# EAGLE board SynthV1 (EAGLE 9.3.2)
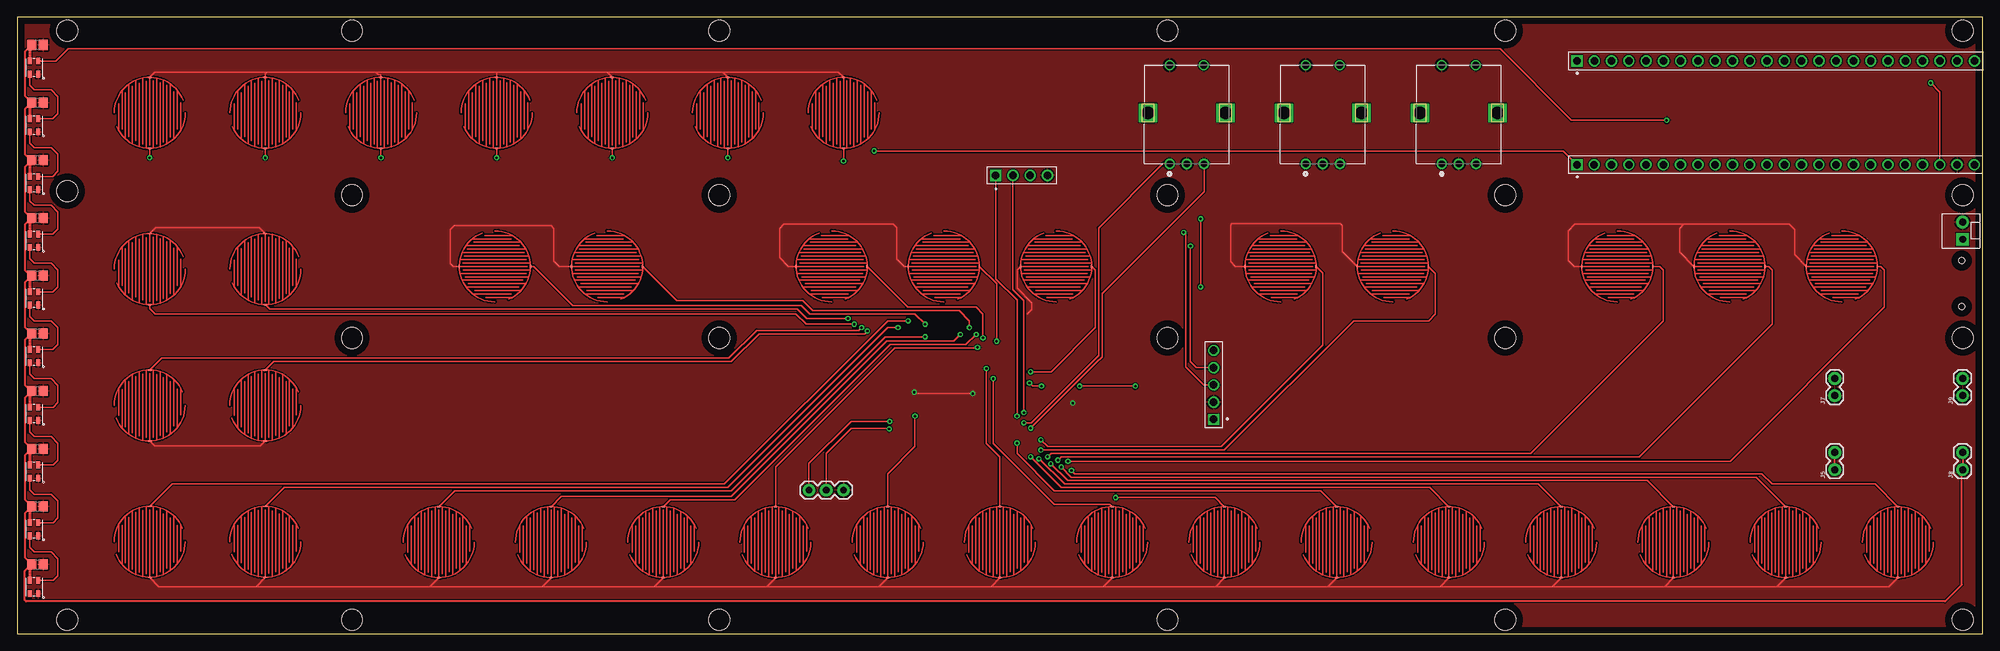
[diagram p0: board, top side]
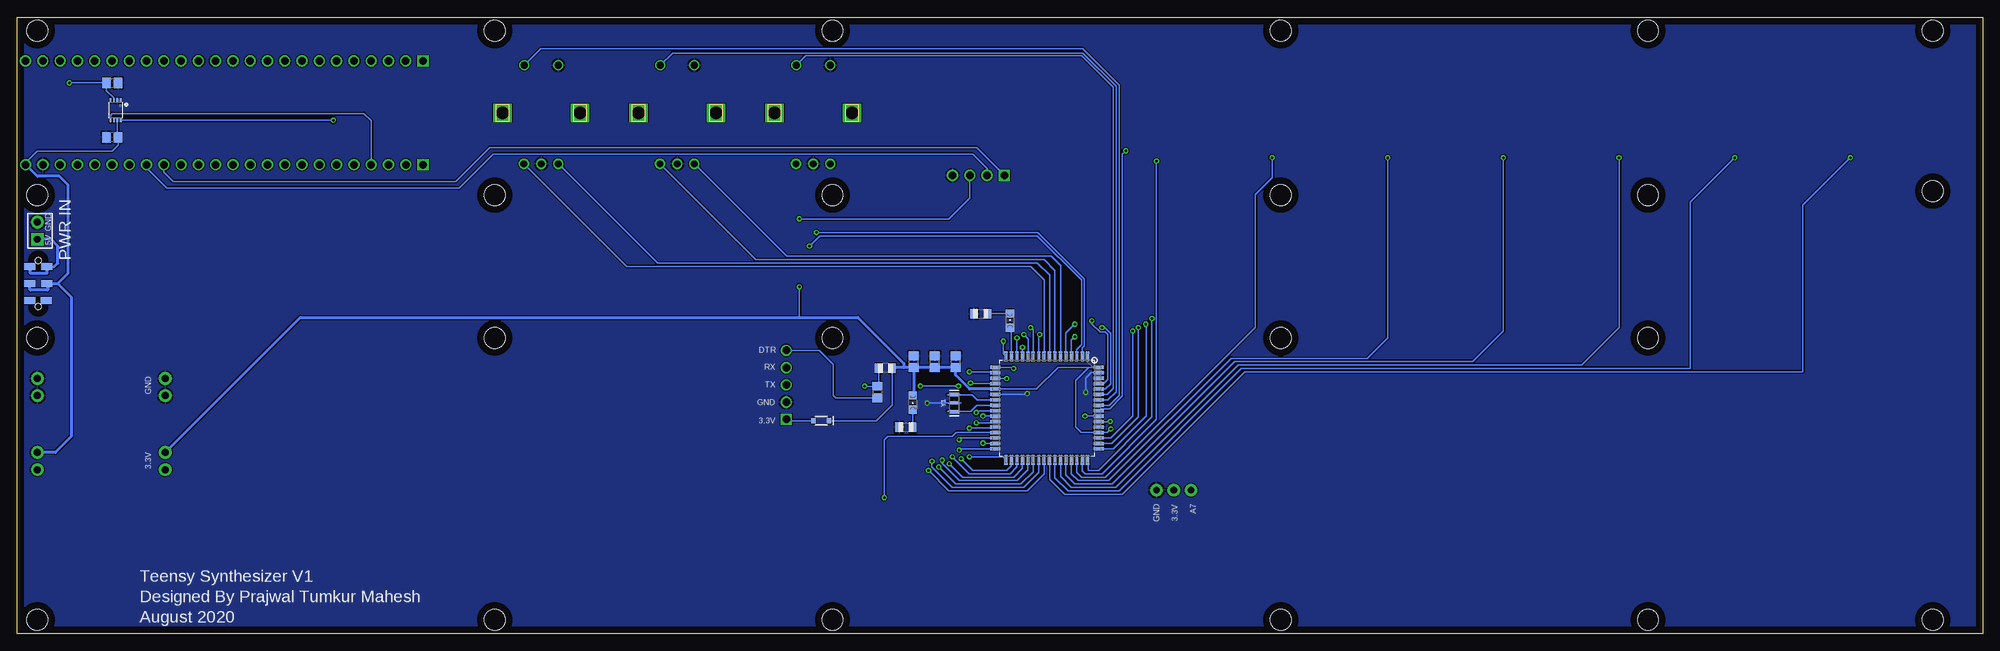
[diagram p1: board, bottom side, seen from below]

Size 289 x 90.7 mm. Coordinates in mm from the lower left corner, seen from the top.
Outline: 0,0 289,0 289,90.7 0,90.7 0,0
Copper layers (1*16): Top 0.035mm / dielectric 1.5mm / Bottom 0.035mm
Design rules "default": minimum track width 6mil, minimum drill 0.35mm, track to track 6mil, track to pad 6mil, pad to pad 6mil, via to via 6mil, smd to smd 6mil, copper to edge 40mil, drill to drill 6mil, minimum pad ring 10mil, minimum via ring 8mil, stop-mask expansion 4mil, vias tented up to drill 0mil, thermal gap 10mil
Holes 3.1 mm at 7.38,88.7 7.38,65.1 7.38,2 49.25,88.7 49.25,64.5 49.25,2 103.25,64.5 103.25,43.5 103.25,2 49.25,43.5 103.25,88.7 169.12,88.7 169.12,64.5 169.12,43.5 169.12,2 218.75,88.7 218.75,64.5 218.75,43.5 218.75,2 286,64.5 286,88.7 286,2 286,43.5

## Footprints (pad centres in the part's own frame; a part is rotated, then mirrored left to right if it is on the bottom)
BUTTONPAD = smd 0.203 x 0.406: P$1 -5.232,0; P$2 5.207,0
1X03 = drill 1.016 pad 1.88: 1 0,0; 2 2.54,0; 3 5.08,0
C0805 = smd 1.3 x 1.5: 1 -0.85,0; 2 0.85,0
SOD-323 = smd 0.63 x 0.83: A 1.15,0; C -1.15,0
PEC11R-4215K-S0024 = drill 1: 1 -2.5,7; 2 2.5,7; A -2.5,-7.5; B 2.55,-7.5; C 0,-7.5 | drill 1.8 square: M1 -5.7,0; M2 5.7,0
61300511121 = drill 1.1 square: 1 -5.08,0 | drill 1.1: 2 -2.54,0; 3 0,0; 4 2.54,0; 5 5.08,0
61302411121 = drill 1.1 square: 1 -29.21,0 | drill 1.1: 2 -26.67,0; 3 -24.13,0; 4 -21.59,0; 5 -19.05,0; 6 -16.51,0; 7 -13.97,0; 8 -11.43,0; 9 -8.89,0; 10 -6.35,0; 11 -3.81,0; 12 -1.27,0; 13 1.27,0; 14 3.81,0; 15 6.35,0; 16 8.89,0; 17 11.43,0; 18 13.97,0; 19 16.51,0; 20 19.05,0; 21 21.59,0; 22 24.13,0; 23 26.67,0; 24 29.21,0
61300411121 = drill 1.1 square: 1 -3.81,0 | drill 1.1: 2 -1.27,0; 3 1.27,0; 4 3.81,0
1X02 = drill 1.016 pad 1.88: 1 0,0; 2 2.54,0
MOLEX-1X2 = drill 1.016 pad 1.88 square: 1 0,0 | drill 1.016 pad 1.88: 2 2.54,0
CHIPLED_0805 = smd 1.2 x 1.2: A 0,-1.05; C 0,1.05
R0805 = smd 1.1 x 1.4: 1 -1,0; 2 1,0
QFP80P1600X1600X120-64N = smd 1.473 x 0.508: 1 -7.62,5.994; 2 -7.62,5.207; 3 -7.62,4.394; 4 -7.62,3.607; 5 -7.62,2.794; 6 -7.62,2.007; 7 -7.62,1.194; 8 -7.62,0.406; 9 -7.62,-0.406; 10 -7.62,-1.194; 11 -7.62,-2.007; 12 -7.62,-2.794; 13 -7.62,-3.607; 14 -7.62,-4.394; 15 -7.62,-5.207; 16 -7.62,-5.994; 33 7.62,-5.994; 34 7.62,-5.207; 35 7.62,-4.394; 36 7.62,-3.607; 37 7.62,-2.794; 38 7.62,-2.007; 39 7.62,-1.194; 40 7.62,-0.406; 41 7.62,0.406; 42 7.62,1.194; 43 7.62,2.007; 44 7.62,2.794; 45 7.62,3.607; 46 7.62,4.394; 47 7.62,5.207; 48 7.62,5.994 | smd 0.508 x 1.473: 17 -5.994,-7.62; 18 -5.207,-7.62; 19 -4.394,-7.62; 20 -3.607,-7.62; 21 -2.794,-7.62; 22 -2.007,-7.62; 23 -1.194,-7.62; 24 -0.406,-7.62; 25 0.406,-7.62; 26 1.194,-7.62; 27 2.007,-7.62; 28 2.794,-7.62; 29 3.607,-7.62; 30 4.394,-7.62; 31 5.207,-7.62; 32 5.994,-7.62; 49 5.994,7.62; 50 5.207,7.62; 51 4.394,7.62; 52 3.607,7.62; 53 2.794,7.62; 54 2.007,7.62; 55 1.194,7.62; 56 0.406,7.62; 57 -0.406,7.62; 58 -1.194,7.62; 59 -2.007,7.62; 60 -2.794,7.62; 61 -3.607,7.62; 62 -4.394,7.62; 63 -5.207,7.62; 64 -5.994,7.62
VFSOP-8 = smd 0.25 x 0.65: P$1 -0.75,-1.45; P$2 -0.25,-1.45; P$3 0.25,-1.45; P$4 0.75,-1.45; P$5 0.75,1.45; P$6 0.25,1.45; P$7 -0.25,1.45; P$8 -0.75,1.45
SK6805-2427 = smd 1 x 0.6: DIN 0.375,1.85; DOUT 2.325,0.55; GND 2.325,1.85; VCC 0.375,0.55
JS202011JAQN = smd 1 x 1.6: P$1 0,0; P$2 2.5,0; P$3 5,0; P$4 0,-2.4; P$5 2.5,-2.5; P$6 5,-2.5 | hole 0.9: -0.9,-1.2; 5.9,-1.2
RESONATOR-SMD-3.2X1.3 = smd 0.45 x 1.905: 1 -1.2,0; 2 0,0; 3 1.2,0

## Placement (x,y rotation side)
38  BUTTONPAD  [BUTTONPAD]  87.5,76.6 270 top
A7  [1X03]  121.5,21.1 180 top
C1  .1uF  [C0805]  157.18,39.97 90 bottom
C2  .1uF  [C0805]  154.1,39.97 90 bottom
C3  .1uF  [C0805]  151.02,39.97 90 bottom
C4  .1uF  [C0805]  162.56,35.53 270 bottom
C5  .1uF  [C0805]  275,73 180 bottom
C6  .1uF  [C0805]  275,81 0 bottom
C7  .1uF  [C0805]  3,86.6 0 top
C8  .1uF  [C0805]  3,78.11 0 top
C9  .1uF  [C0805]  3,69.62 0 top
C10  .1uF  [C0805]  3,61.13 0 top
C11  .1uF  [C0805]  3,52.64 0 top
C12  .1uF  [C0805]  3,44.16 0 top
C13  .1uF  [C0805]  3,35.67 0 top
C14  .1uF  [C0805]  3,27.18 0 top
C15  .1uF  [C0805]  3,18.69 0 top
C16  .1uF  [C0805]  3,10.2 0 top
D1  0.5A/40V/420mV  [SOD-323]  170.77,31.29 180 bottom
EN1  PEC11R-4215K-S0024  [PEC11R-4215K-S0024]  171.94,76.6 0 top
EN2  PEC11R-4215K-S0024  [PEC11R-4215K-S0024]  191.94,76.6 0 top
EN3  PEC11R-4215K-S0024  [PEC11R-4215K-S0024]  211.94,76.6 0 top
J1  61300511121  [61300511121]  175.91,36.58 90 top
J2  Teensy2  [61302411121]  258.52,68.98 0 top
J3  Teensy1  [61302411121]  258.53,84.22 0 top
J4  OLED  [61300411121]  147.67,67.41 0 top
J5  [1X02]  267.2,24.1 90 top
J6  [MOLEX-1X2]  286,58 90 top
J7  [1X02]  267.2,35 90 top
J8  [1X02]  286,24.1 90 top
J9  [1X02]  286,35 90 top
LED1  [CHIPLED_0805]  157.32,33.97 180 bottom
LED2  [CHIPLED_0805]  143.03,46.03 0 bottom
R1  10k  [R0805]  158.33,30.38 0 bottom
R2  10k  [R0805]  147.33,47.03 0 bottom
R3  10k  [R0805]  161.35,39.06 180 bottom
U1  ATMEGA64A-AU  [QFP80P1600X1600X120-64N]  137.61,33.17 270 bottom
U2  [VFSOP-8]  274.5,77 180 bottom
U$1  BUTTONPAD  [BUTTONPAD]  62,13.45 90 top
U$2  BUTTONPAD  [BUTTONPAD]  78.5,13.45 90 top
U$3  BUTTONPAD  [BUTTONPAD]  95,13.45 90 top
U$4  BUTTONPAD  [BUTTONPAD]  111.5,13.45 90 top
U$5  BUTTONPAD  [BUTTONPAD]  128,13.45 90 top
U$6  BUTTONPAD  [BUTTONPAD]  144.5,13.45 90 top
U$7  BUTTONPAD  [BUTTONPAD]  161,13.45 90 top
U$8  BUTTONPAD  [BUTTONPAD]  177.5,13.45 90 top
U$9  BUTTONPAD  [BUTTONPAD]  194,13.45 90 top
U$10  BUTTONPAD  [BUTTONPAD]  210.5,13.45 90 top
U$11  BUTTONPAD  [BUTTONPAD]  227,13.45 90 top
U$12  BUTTONPAD  [BUTTONPAD]  243.5,13.45 90 top
U$13  BUTTONPAD  [BUTTONPAD]  260,13.45 90 top
U$14  BUTTONPAD  [BUTTONPAD]  276.5,13.45 90 top
U$15  BUTTONPAD  [BUTTONPAD]  70.25,54 0 top
U$16  BUTTONPAD  [BUTTONPAD]  86.75,54 0 top
U$17  BUTTONPAD  [BUTTONPAD]  119.75,54 0 top
U$18  BUTTONPAD  [BUTTONPAD]  136.25,54 0 top
U$19  BUTTONPAD  [BUTTONPAD]  152.75,54 0 top
U$20  BUTTONPAD  [BUTTONPAD]  185.75,54 0 top
U$21  BUTTONPAD  [BUTTONPAD]  202.25,54 0 top
U$22  BUTTONPAD  [BUTTONPAD]  235.25,54 0 top
U$23  BUTTONPAD  [BUTTONPAD]  251.75,54 0 top
U$24  BUTTONPAD  [BUTTONPAD]  268.25,54 0 top
U$25  NEOPIXEL_NANO_2427  [SK6805-2427]  1.3,84.6 270 top
U$26  NEOPIXEL_NANO_2427  [SK6805-2427]  1.3,76.11 270 top
U$27  NEOPIXEL_NANO_2427  [SK6805-2427]  1.3,67.62 270 top
U$28  BUTTONPAD  [BUTTONPAD]  36.5,13.5 90 top
U$29  BUTTONPAD  [BUTTONPAD]  19.5,53.6 270 top
U$30  BUTTONPAD  [BUTTONPAD]  19.5,33.55 90 top
U$31  BUTTONPAD  [BUTTONPAD]  36.5,33.55 90 top
U$32  BUTTONPAD  [BUTTONPAD]  19.5,13.5 90 top
U$33  BUTTONPAD  [BUTTONPAD]  36.5,53.6 270 top
U$34  BUTTONPAD  [BUTTONPAD]  121.5,76.6 270 top
U$35  BUTTONPAD  [BUTTONPAD]  104.5,76.6 270 top
U$36  NEOPIXEL_NANO_2427  [SK6805-2427]  1.3,59.13 270 top
U$37  BUTTONPAD  [BUTTONPAD]  19.5,76.6 270 top
U$38  BUTTONPAD  [BUTTONPAD]  36.5,76.6 270 top
U$39  BUTTONPAD  [BUTTONPAD]  53.5,76.6 270 top
U$40  BUTTONPAD  [BUTTONPAD]  70.5,76.6 270 top
U$41  NEOPIXEL_NANO_2427  [SK6805-2427]  1.3,50.64 270 top
U$42  NEOPIXEL_NANO_2427  [SK6805-2427]  1.3,42.16 270 top
U$43  NEOPIXEL_NANO_2427  [SK6805-2427]  1.3,33.67 270 top
U$44  NEOPIXEL_NANO_2427  [SK6805-2427]  1.3,25.18 270 top
U$45  NEOPIXEL_NANO_2427  [SK6805-2427]  1.3,16.69 270 top
U$46  NEOPIXEL_NANO_2427  [SK6805-2427]  1.3,8.2 270 top
U$47  JS202011JAQN  [JS202011JAQN]  287.1,49 90 bottom
Y1  8MHz  [RESONATOR-SMD-3.2X1.3]  151.23,33.9 90 bottom

## Library data of the parts
38 U$29 U$34 U$35 U$37-U$40 = ButtonContacts; SPICEPREFIX: B
A7 J5 J7-J9 = SparkFun-Connectors
C1-C16 LED1 LED2 U2 = adafruit
D1 = SparkFun-DiscreteSemi; PROD_ID: DIO-10955
EN1-EN3 = Encoders; CREATED_BY: PCBLayout.com; DIGIKEY_PARTNO: PEC11R-4215K-S0024-ND; MANUFACTURER: Bourns Inc.; MPN: PEC11R-4215K-S0024; SPICEPREFIX: X
J1 = Headers; CREATED_BY: PCBLayout.com; DIGI_KEY_PART_NUMBER: 732-5318-ND; MANUFACTURER: Wurth Electronics Inc.; MPN: 61300511121
J2 J3 = Headers; CREATED_BY: PCBLayout.com; DIGIKEY_PART_NUMBER: 732-5331-ND; MANUFACTURER: Wurth Electronics Inc.; MPN: 61302411121
J4 = Headers; CREATED_BY: PCBLayout.com; DIGI_KEY_PART_NUMBER: 732-5317-ND; MANUFACTURER: Wurth Electronics Inc.; MPN: 61300411121
J6 = SparkFun-Connectors; SF_ID: PRT-09918
R1-R3 = audio amplifier example
U1 = ATMEGA64A-AU; ARROW_ELECTRONICS-PURCHASE-URL: https://snapeda.com/shop?store=Arrow+Electronics&id=681715; DESCRIPTION: AVR AVR® ATmega Microcontroller IC 8-Bit 16MHz 64KB (32K x 16) FLASH 64-TQFP (14x14); DIGI-KEY_PART_NUMBER: ATMEGA64A-AURTR-ND; DIGIKEY-PURCHASE-URL: https://snapeda.com/shop?store=DigiKey&id=681715; MF: Microchip; MOUSER-PURCHASE-URL: https://snapeda.com/shop?store=Mouser&id=681715; MP: ATMEGA64A-AU; PACKAGE: TQFP-64 Microchip
U$1-U$24 U$28 U$30-U$33 = ButtonContacts
U$25-U$27 U$36 U$41-U$46 = NeoPixel Nano 2427
U$47 = SMD Slide Switch
Y1 = SparkFun-Clocks; PROD_ID: XTAL-08895

## Nets
2: U1.4 U$1.P$2
3: U1.5 U$15.P$2
3.3V: A7.2 C1.1 C2.1 C3.1 D1.C J4.3 J5.1 J5.2 LED1.A R3.1 U1.21 U1.52 U1.64
5V: C5.1 C7.1 C8.1 C9.1 C10.1 C11.1 C12.1 C13.1 C14.1 C15.1 C16.1 J2.24 J8.1 J8.2 U2.P$7 U$25.VCC U$26.VCC U$27.VCC U$36.VCC U$41.VCC U$42.VCC U$43.VCC U$44.VCC U$45.VCC U$46.VCC U$47.P$2 U$47.P$5
5VIN: J6.1 U$47.P$3 U$47.P$6
8: U1.10 U$2.P$2
9: U1.11 U$16.P$2
10: U1.12 U$3.P$2
11: U1.13 U$4.P$2
12: U1.14 U$17.P$2
13: LED2.A U1.15
14: U1.16 U$18.P$2
15: U1.17 U$6.P$2
16: U1.18 U$19.P$2
17: U1.19 U$7.P$2
22: U1.29 U$8.P$2
23: U1.30 U$20.P$2
24: U1.31 U$9.P$2
25: U1.32 U$21.P$2
26: U1.33 U$10.P$2
27: U1.34 U$11.P$2
28: U1.35 U$22.P$2
29: U1.36 U$12.P$2
30: U1.37 U$23.P$2
31: U1.38 U$13.P$2
32: U1.39 U$24.P$2
33: U1.40 U$14.P$2
34: U1.41 U$37.P$2
35: U1.42 U$38.P$2
36: U1.43 U$39.P$2
37: U1.44 U$40.P$2
38: 38.P$2 U1.45
39: U1.46 U$35.P$2
40: U1.47 U$34.P$2
41: U1.48 U$33.P$2
42: U1.49 U$29.P$2
43: U1.50 U$30.P$2
44: U1.51 U$31.P$2
A0: U1.61 U$32.P$2
A1: U1.60 U$28.P$2
A2: EN1.2 U1.59
A3: EN2.2 U1.58
A4: EN3.2 U1.57
A5: J2.1 U1.56
A6: U1.55 U$5.P$2
A7: A7.3 U1.54
AREF: U1.62
DTR: C4.2 J1.5
GND: 38.P$1 A7.1 C1.2 C2.2 C3.2 C5.2 C6.2 C7.2 C8.2 C9.2 C10.2 C11.2 C12.2 C13.2 C14.2 C15.2 C16.2 EN1.1 EN1.C EN2.1 EN2.C EN3.1 EN3.C J1.2 J2.23 J4.4 J6.2 J7.1 J7.2 J9.1 J9.2 R1.1 R2.1 U1.22 U1.53 U1.63 U2.P$2 U$1.P$1 U$2.P$1 U$3.P$1 U$4.P$1 U$5.P$1 U$6.P$1 U$7.P$1 U$8.P$1 U$9.P$1 U$10.P$1 U$11.P$1 U$12.P$1 U$13.P$1 U$14.P$1 U$15.P$1 U$16.P$1 U$17.P$1 U$18.P$1 U$19.P$1 U$20.P$1 U$21.P$1 U$22.P$1 U$23.P$1 U$24.P$1 U$25.GND U$26.GND U$27.GND U$28.P$1 U$29.P$1 U$30.P$1 U$31.P$1 U$32.P$1 U$33.P$1 U$34.P$1 U$35.P$1 U$36.GND U$37.P$1 U$38.P$1 U$39.P$1 U$40.P$1 U$41.GND U$42.GND U$43.GND U$44.GND U$45.GND U$46.GND Y1.2
INT0: EN1.A U1.27
INT1: EN1.B U1.28
INT2: EN2.A U1.6
INT3: EN2.B U1.7
INT4: EN3.A U1.8
INT5: EN3.B U1.9
LED_H: U2.P$8 U$25.DIN
LED_L: J2.4 U2.P$5
N$1: U1.23 Y1.3
N$2: U$25.DOUT U$26.DIN
N$3: U$26.DOUT U$27.DIN
N$4: U$27.DOUT U$36.DIN
N$5: U$36.DOUT U$41.DIN
N$6: U$41.DOUT U$42.DIN
N$7: U$42.DOUT U$43.DIN
N$8: U$43.DOUT U$44.DIN
N$9: U$44.DOUT U$45.DIN
N$10: LED2.C R2.2
N$11: LED1.C R1.2
N$12: U$45.DOUT U$46.DIN
RST: C4.1 R3.2 U1.20
RX0: J1.3 U1.2
SCL: J2.17 J4.2 U1.25
SDA: J2.16 J4.1 U1.26
T3.3V: C6.1 J2.22 U2.P$3
TX0: J1.4 U1.3
VUSB: D1.A J1.1
XTAL1: U1.24 Y1.1

## Tracks (layer width: path | path; a pad name or v marks a point on that pad's centre or on a via)
2  (via drill 0.35)
  Top 0.254: U$1.P$2 64.34,21 105,21 127.66,43.66 v133.5,43.66
  Bottom 0.254: v133.5,43.66 134,43.15 U1.4
3  (via drill 0.35)
  Top 0.254: U$15.P$2 75.96,54 81.73,48.23 115.27,48.23 116.5,47 120.9,47 132,47 v133.5,45.5
  Bottom 0.254: v133.5,45.5 134.82,44.18 U1.5
3.3V  (via drill 0.35)
  Top 0.254: v174,61 v174,51 | A7.2 118.96,26.5 122.66,30.2 128.1,30.2 v128.2,30.1
  Top 0.305: J5.1 J5.2
  Bottom 0.254: 160.29,39.12 R3.1 160.35,33.65 162.71,31.29 D1.C | J4.3 148.94,64.06 152,61 v174,61 | v174,51 174,46.5 | U1.21 139.14,35.96 135.94,39.16 U1.64 131.44,39.16 133.4,37.2 133.4,30.4 132.56,29.56 U1.52 128.74,29.56 v128.2,30.1
  Bottom 0.406: J5.2 247.34,46.5 174,46.5 165.38,46.5 158.64,39.76 158.64,39.12 | C1.1 C2.1 C3.1 151.02,38.02 148.96,35.96 U1.21 | C1.1 158.64,39.12 | 160.29,39.12 158.7,39.12 158.64,39.12 | C1.1 157.18,35.16 LED1.A
5V
  Top 0.305: C7.1 1.17,85.62 1.17,79.09 C8.1 1.17,77.13 1.17,70.5 2.05,69.62 C9.1 1.17,68.64 1.17,62.1 2.13,61.13 C10.1 1.17,60.15 1.17,53.5 2.02,52.64 C11.1 1.17,51.66 1.17,45.1 2.11,44.16 C12.1 1.17,43.17 1.17,36.6 2.1,35.67 C13.1 1.17,34.69 1.17,28.16 C14.1 1.17,26.2 1.17,19.7 2.15,18.72 C15.1 1.17,17.71 1.17,11.18 C16.1 1.17,9.22 1.17,4.9 1.35,4.72 283.42,4.72 285.9,7.2 285.9,24 J8.1 J8.2
  Top 0.406: C7.1 1.85,86.3 U$25.VCC | C8.1 1.85,77.81 U$26.VCC | C9.1 1.85,69.32 U$27.VCC | C10.1 1.85,60.83 U$36.VCC | C11.1 1.85,52.34 U$41.VCC | C12.1 1.85,43.86 U$42.VCC | C13.1 1.85,35.37 U$43.VCC | C14.1 1.85,26.88 U$44.VCC | C15.1 1.85,18.39 U$45.VCC | C16.1 1.85,9.9 U$46.VCC
  Bottom 0.254: U2.P$7 274.25,73.1 C5.1 274.15,71.85 275,71 286,71 287.73,69.27 J2.24
  Bottom 0.406: U$47.P$2 287.1,50.6 287,50.5 284.5,50.5 284.5,51.4 U$47.P$5 283,51.5 | 283,51.5 281.5,53 281.5,66 282.77,67.27 286.02,67.27 J2.24 | J8.2 283.36,26.64 281,29 281,49.5 283,51.5
5VIN
  Bottom 0.406: U$47.P$3 287.1,53.1 287,53 284.6,53 U$47.P$6 283.5,54 283,54.5 283,57 284,58 J6.1
8  (via drill 0.35)
  Top 0.254: U$2.P$2 80,20.16 105,20.16 127.84,43 137.67,43 v138.67,44
  Bottom 0.254: v138.67,44 138.8,43.87 U1.10
9  (via drill 0.35)
  Top 0.254: v140,45 140,46 138.5,47.5 117,47.5 115.5,49 96.96,49 U$16.P$2
  Bottom 0.254: U1.11 139.62,44.62 v140,45
10  (via drill 0.35)
  Top 0.254: U$3.P$2 96,19.66 105.5,19.66 128.34,42.5 139.5,42.5 v141,44
  Bottom 0.254: v141,44 140.34,43.34 140.34,41.6 140.34,40.85 U1.12
11  (via drill 0.35)
  Top 0.254: U$4.P$2 111.5,24.5 129,42 141.1,42 v141.2,42.1
  Bottom 0.254: v141.2,42.1 141.22,42.08 U1.13
12  (via drill 0.35)
  Top 0.254: U$17.P$2 130.96,48 141,48 142,47 v142,43.5
  Bottom 0.254: v142,43.5 U1.14
13
  Bottom 0.254: LED2.A 142.82,44.77 U1.15
14  (via drill 0.35)
  Top 0.254: U$18.P$2 144,51.46 v144,43
  Bottom 0.254: v144,43 144,41.19 U1.16
15  (via drill 0.35)
  Top 0.254: U$6.P$2 144.5,26 142.5,28 v142.5,39
  Bottom 0.254: v142.5,39 142.66,39.16 U1.17
16  (via drill 0.35)
  Top 0.254: U$19.P$2 158.5,53.46 158.5,45 152,38.5 v149,38.5
  Bottom 0.254: v149,38.5 145.35,38.5 U1.18
17  (via drill 0.35)
  Top 0.254: U$7.P$2 160.66,19 152.5,19 143.5,28 v143.5,37.5
  Bottom 0.254: v143.5,37.5 145.17,37.5 U1.19
22  (via drill 0.35)
  Top 0.254: U$8.P$2 176.16,20 v161.5,20
  Bottom 0.254: U1.29 150.94,29.56 151.5,29 161,29 161.5,28.5 v161.5,20
23  (via drill 0.35)
  Top 0.254: U$20.P$2 191.96,53 191.96,42.46 177,27.5 151.5,27.5 v150.5,28.5
  Bottom 0.254: v150.5,28.5 150.22,28.78 U1.30
24  (via drill 0.35)
  Top 0.254: U$9.P$2 191.66,21 152.5,21 147,26.5 v147,28
  Bottom 0.254: v147,28 145.27,28 U1.31
25  (via drill 0.35)
  Top 0.254: U$21.P$2 208.5,52.96 208.5,47 207.5,46 196.5,46 177.5,27 v150.5,27
  Bottom 0.254: v150.5,27 150.32,27.18 U1.32
26  (via drill 0.35)
  Top 0.254: U$10.P$2 207.66,21.5 153.5,21.5 v149,26
  Bottom 0.254: v149,26 144.05,26 U1.33
27  (via drill 0.35)
  Top 0.254: U$11.P$2 223.66,22 154,22 150.28,25.71 v150.22,25.71
  Bottom 0.254: v150.22,25.71 148.5,24 143.5,24 142.82,24.68 U1.34
28  (via drill 0.35)
  Top 0.254: v151.5,26 152,26.5 222.5,26.5 242,46 242,53.5 241.5,54 U$22.P$2
  Bottom 0.254: v151.5,26 149,23.5 143,23.5 142,24.5 U1.35
29  (via drill 0.35)
  Top 0.254: U$12.P$2 239.66,22.5 154.43,22.5 v151.97,24.96
  Bottom 0.254: U1.36 141.22,24.28 142.5,23 150,23 v151.97,24.96
30  (via drill 0.35)
  Top 0.254: v153,25.5 153.5,26 238.5,26 258,45.5 258,53.5 257.5,54 U$23.P$2
  Bottom 0.254: v153,25.5 153,25 150.5,22.5 142,22.5 140.4,24.1 U1.37
31  (via drill 0.35)
  Top 0.254: U$13.P$2 255.66,23 155,23 v153.5,24.5
  Bottom 0.254: v153.5,24.5 151,22 141.43,22 139.62,23.81 U1.38
32  (via drill 0.35)
  Top 0.254: U$24.P$2 274,54 274.5,53.5 274.5,48 251.84,25.34 v154.5,25.34
  Bottom 0.254: v154.5,25.34 154.5,24.5 151.5,21.5 141,21.5 138.8,23.7 U1.39
33  (via drill 0.35)
  Top 0.254: U$14.P$2 273.16,22 258,22 256.5,23.5 155.5,23.5 v155,24
  Bottom 0.254: v155,24 152,21 140.5,21 138.02,23.48 U1.40
34  (via drill 0.35)
  Top 0.254: U$37.P$2 v19.5,70
  Bottom 0.254: U1.41 137.2,22.7 135,20.5 126.5,20.5 108.5,38.5 26.5,38.5 26.5,63 v19.5,70
35  (via drill 0.35)
  Top 0.254: U$38.P$2 v36.5,70
  Bottom 0.254: U1.42 136.42,22.92 134.5,21 127,21 109,39 43,39 43,63.5 v36.5,70
36  (via drill 0.35)
  Top 0.254: U$39.P$2 v53.5,70
  Bottom 0.254: v53.5,70 53.5,45 59,39.5 109.5,39.5 127.5,21.5 134,21.5 135.6,23.1 U1.43
37  (via drill 0.35)
  Top 0.254: U$40.P$2 v70.5,70
  Bottom 0.254: v70.5,70 70.5,44.5 75,40 110,40 128,22 133.5,22 134.82,23.32 U1.44
38  (via drill 0.35)
  Top 0.254: 38.P$2 v87.5,70
  Bottom 0.254: U1.45 134,23.5 133,22.5 128.5,22.5 110.5,40.5 90.5,40.5 87.5,43.5 v87.5,70
39  (via drill 0.35)
  Top 0.254: U$35.P$2 v104.5,70
  Bottom 0.254: v104.5,70 104.5,67.06 107,64.56 107,45 129,23 132.5,23 133.22,23.72 U1.46
40  (via drill 0.35)
  Top 0.254: U$34.P$2 v121.5,69.5
  Bottom 0.254: v121.5,69.5 121.5,31.5 129.5,23.5 132,23.5 132.4,23.9 U1.47
41  (via drill 0.35)
  Top 0.254: U$33.P$2 37.14,47.75 114.67,47.75 116.08,46.34 v122.16,46.34
  Bottom 0.254: U1.48 131.5,25.43 131.5,24 130,24 122.16,31.84 v122.16,46.34
42  (via drill 0.35)
  Top 0.254: U$29.P$2 19.5,47.8 20.3,47 114.5,47 116,45.5 v123.07,45.5
  Bottom 0.254: U1.49 127.82,27.18 123,32 123,45.5 v123.07,45.5
43  (via drill 0.35)
  Top 0.254: U$30.P$2 21.24,40.5 104.63,40.5 108.73,44.59 123.75,44.59 v124.16,45
  Bottom 0.254: U1.50 128.04,27.96 124.16,31.84 v124.16,45
44  (via drill 0.35)
  Top 0.254: U$31.P$2 37.74,39.99 104.99,39.99 109.09,44.09 123.5,44.09 123.59,44.09 124.59,44.09 v125,44.5
  Bottom 0.254: U1.51 128.22,28.78 125,32 v125,44.5
A0  (via drill 0.35)
  Top 0.254: v131,46 128,46 104,22 22.79,22 U$32.P$2
  Bottom 0.254: U1.61 129.22,36.78 128.66,37.34 128.66,44 129,44.34 129.77,44.34 131,45.57 v131,46
A1  (via drill 0.35)
  Top 0.254: U$28.P$2 39.29,21.5 104.5,21.5 128,45 v129.5,45
  Bottom 0.254: U1.60 129.95,36 129,36 128.25,36.75 128.25,44.17 129.08,45 v129.5,45
A2
  Bottom 0.254: EN1.2 173.04,85 132.5,85 127.84,80.34 127.84,36.08 128.75,35.18 U1.59
A3
  Bottom 0.254: U1.58 128.64,34.36 127.44,35.56 127.44,55.5 127.44,80.51 132.33,85.41 192.63,85.41 EN2.2
A4
  Bottom 0.254: U1.57 128.42,33.58 127,35 127,80.65 132.35,86 212.04,86 EN3.2
A5  (via drill 0.35)
  Top 0.254: v126,71 227.29,71 J2.1
  Bottom 0.254: U1.56 129.71,33.04 128.38,33.04 126.5,34.92 126.5,70.5 v126,71
A6  (via drill 0.35)
  Top 0.254: U$5.P$2 128,23.5 132,27.5 v132,32
  Bottom 0.254: v132,32 130.01,32 U1.55
A7  (via drill 0.35)
  Top 0.254: v128.3,31.2 122.6,31.2 116.42,25.02 A7.3
  Bottom 0.254: U1.54 128.34,31.16 v128.3,31.2
DTR
  Bottom 0.254: J1.5 171.09,41.66 169,39.57 169,35 168.68,34.68 C4.2
GND  (via drill 0.35)
  Top 0.254: U$38.P$1 36.5,82.4 36.6,82.4 36.8,82.6 | 36.8,82.6 52.8,82.6 | 52.8,82.6 52.8,82.53 53.1,82.23 53.5,82.23 | 53.5,82.23 U$39.P$1 53.5,82.23 | U$40.P$1 70.5,82.6 | 70.5,82.6 52.8,82.6 | 38.P$1 86.73,82.6 | 86.73,82.6 70.5,82.6 | U$35.P$1 103.73,82.6 | 103.73,82.6 86.73,82.6 | U$34.P$1 120.73,82.6 103.73,82.6 | U$37.P$1 20.27,82.6 36.8,82.6 | U$29.P$1 20.37,59.7 35.63,59.7 U$33.P$1 | U$30.P$1 20.22,27.6 35.78,27.6 U$31.P$1 | U$32.P$1 20.87,6.9 35.13,6.9 | U$28.P$1 35.13,6.9 | U$1.P$1 60.68,6.9 | 60.68,6.9 35.13,6.9 | U$2.P$1 77.18,6.9 | 77.18,6.9 60.68,6.9 | U$3.P$1 93.68,6.9 | 93.68,6.9 77.18,6.9 | U$4.P$1 110.18,6.9 | 110.18,6.9 93.68,6.9 | U$5.P$1 126.68,6.9 | 126.68,6.9 110.18,6.9 | U$6.P$1 143.18,6.9 | 143.18,6.9 126.68,6.9 | U$7.P$1 159.68,6.9 | 159.68,6.9 143.18,6.9 | U$8.P$1 176.18,6.9 | 176.18,6.9 159.68,6.9 | U$9.P$1 192.68,6.9 | 192.68,6.9 176.18,6.9 | U$10.P$1 209.18,6.9 | 209.18,6.9 192.68,6.9 | U$11.P$1 225.68,6.9 | 225.68,6.9 209.18,6.9 | U$12.P$1 242.18,6.9 | 242.18,6.9 225.68,6.9 | U$13.P$1 258.68,6.9 | 258.68,6.9 242.18,6.9 | U$14.P$1 275.18,6.9 258.68,6.9 | U$23.P$1 244.4,56.12 244.4,59.6 245,60.2 | U$24.P$1 261.3,55.72 261.3,59.4 260.5,60.2 245,60.2 | 229.62,54 228.9,54 228,54.9 228,59.2 229,60.2 245,60.2 | 229.62,54 U$22.P$1 229.62,54 | U$21.P$1 194.8,56.22 194.8,60 194.5,60.3 178.6,60.3 178.4,60.1 178.4,54.7 179.1,54 U$20.P$1 | U$18.P$1 130.4,54 129.3,55.1 129.3,59.7 128.8,60.2 112.7,60.2 112.1,59.6 112.1,55.3 113.4,54 U$17.P$1 | U$16.P$1 79.7,54 78.9,54.8 78.9,59.6 78.5,60 64.3,60 63.7,59.4 63.7,54.4 64.1,54 64.62,54 | 64.62,54 | U$15.P$1 64.62,54 | U$19.P$1 147,53.48 147,50.8 149.2,48.6 149.2,47.7 148.5,47 | v131.9,35.5 132.1,35.3 v140.5,35.3
  Bottom 0.254: Y1.2 v155.2,33.9 | U1.22 140.62,35.18 v140.5,35.3 | U1.63 131.08,38.38 131.1,38.4 131.9,37.6 v131.9,35.5
  pour Top: 0,90.7 289,90.7 289,0 0,0
  pour Bottom: 0,90.7 289,90.7 289,0 0,0
INT0  (via drill 0.35)
  Top 0.254: EN1.A 168.44,69.1 159,59.66 159,40.92 149.07,31 v148,31
  Bottom 0.254: v148,31 145.39,31 U1.27
INT1  (via drill 0.35)
  Top 0.254: EN1.B 174.49,64.99 159.5,50 159.5,40.72 158.64,39.86 v149,30.22
  Bottom 0.254: v149,30.22 145.38,30.22 U1.28
INT2
  Bottom 0.254: EN2.A 175.84,55.5 137,55.5 135.6,54.1 U1.6
INT3
  Bottom 0.254: EN2.B 180.39,55 138,55 136.42,53.42 U1.7
INT4
  Bottom 0.254: EN3.A 194.84,54.5 139,54.5 137.2,52.7 U1.8
INT5
  Bottom 0.254: EN3.B 199.39,54 140,54 138.02,52.02 U1.9
LED_H  (via drill 0.35)
  Top 0.254: v242.5,75.5 228.5,75.5 218,86 7.5,86 6.8,85.3 5.72,84.22 U$25.DIN
  Bottom 0.254: U2.P$8 242.55,75.55 v242.5,75.5
LED_L
  Bottom 0.254: U2.P$5 275.25,76.25 275,76.5 238,76.5 236.93,75.43 J2.4
N$1
  Bottom 0.254: U1.23 147.86,34.36 148.6,35.1 Y1.3
N$2
  Top 0.254: U$25.DOUT 1.85,80.65 2.5,80 5,80 6,79 6,76.5 5.24,75.74 U$26.DIN
N$3
  Top 0.254: U$26.DOUT 1.85,72.15 2.5,71.5 5,71.5 6,70.5 6,68 5.25,67.25 U$27.DIN
N$4
  Top 0.254: U$27.DOUT 1.85,63.65 2.5,63 5,63 6,62 6,59.5 5.26,58.76 U$36.DIN
N$5
  Top 0.254: U$36.DOUT 1.85,55.15 2.5,54.5 5,54.5 6,53.5 6,51 5.27,50.27 U$41.DIN
N$6
  Top 0.254: U$41.DOUT 1.85,46.65 2.5,46 5,46 6,45 6,42.5 5.28,41.78 U$42.DIN
N$7
  Top 0.254: U$42.DOUT 1.85,38.15 2.5,37.5 5,37.5 6,36.5 6,34 5.29,33.29 U$43.DIN
N$8
  Top 0.254: U$43.DOUT 1.85,29.65 2.5,29 5,29 6,28 6,25.5 5.3,24.8 U$44.DIN
N$9
  Top 0.254: U$44.DOUT 1.85,21.15 2.5,20.5 5,20.5 6,19.5 6,17 5.31,16.31 U$45.DIN
N$10
  Bottom 0.254: LED2.C 146.28,47.08 R2.2
N$11
  Bottom 0.254: LED1.C R1.2
N$12
  Top 0.254: U$45.DOUT 1.85,12.65 2.5,12 5,12 6,11 6,8.5 5.33,7.83 U$46.DIN
RST  (via drill 0.35)
  Top 0.254: v164.4,36.4 v156.2,36.4 | v150.6,36.4 149.3,36.4 v148.83,36.87
  Bottom 0.254: R3.2 162.35,36.59 C4.1 164.38,36.38 v164.4,36.4 | v156.2,36.4 v150.6,36.4 | v148.83,36.87 148.74,36.78 U1.20
RX0  (via drill 0.35)
  Top 0.254: J1.3 174.42,36.58 171.82,39.18 171.82,58.68 v171.5,59
  Bottom 0.254: U1.2 132.4,42.02 132.09,42.33 132.09,52.17 138.93,59 v171.5,59
SCL  (via drill 0.35)
  Top 0.254: J4.2 146.4,50.6 148,49 v148,32.5
  Bottom 0.254: U1.25 147.74,32.76 v148,32.5 | J4.2 146.4,68.4 148.5,70.5 219,70.5 224,65.5 267,65.5 269.95,68.45 J2.17
SDA  (via drill 0.35)
  Top 0.254: v147,32 147,49.03 143.86,52.17 J4.1
  Bottom 0.254: U1.26 145.25,32 v147,32 | J4.1 147.95,71.5 219.5,71.5 224.5,66.5 266,66.5 267.41,67.91 J2.16
T3.3V  (via drill 0.35)
  Top 0.254: v281.3,81 282.65,79.65 J2.22
  Bottom 0.254: U2.P$3 274.75,78.8 275.85,79.89 C6.1 v281.3,81
TX0  (via drill 0.35)
  Top 0.254: v172.5,57 172.5,40 173.38,39.12 J1.4
  Bottom 0.254: U1.3 133.22,41.78 132.5,42.5 132.5,52 139,58.5 171,58.5 v172.5,57
VUSB
  Bottom 0.254: D1.A 175.7,31.29 J1.1
XTAL1
  Bottom 0.254: U1.24 147.92,33.58 148.8,32.7 Y1.1

## Text on the board
bNames: GND | 5V | PWR IN | DTR | RX | TX | GND | GND | 3.3V | 3.3V | A7 | 3.3V | GND | Teensy Synthesizer V1 | Designed By Prajwal Tumkur Mahesh | August 2020
tValues: SDA | SCL | 3.3V | GND